# EAGLE board DuckyBRD (EAGLE 9.7.0)
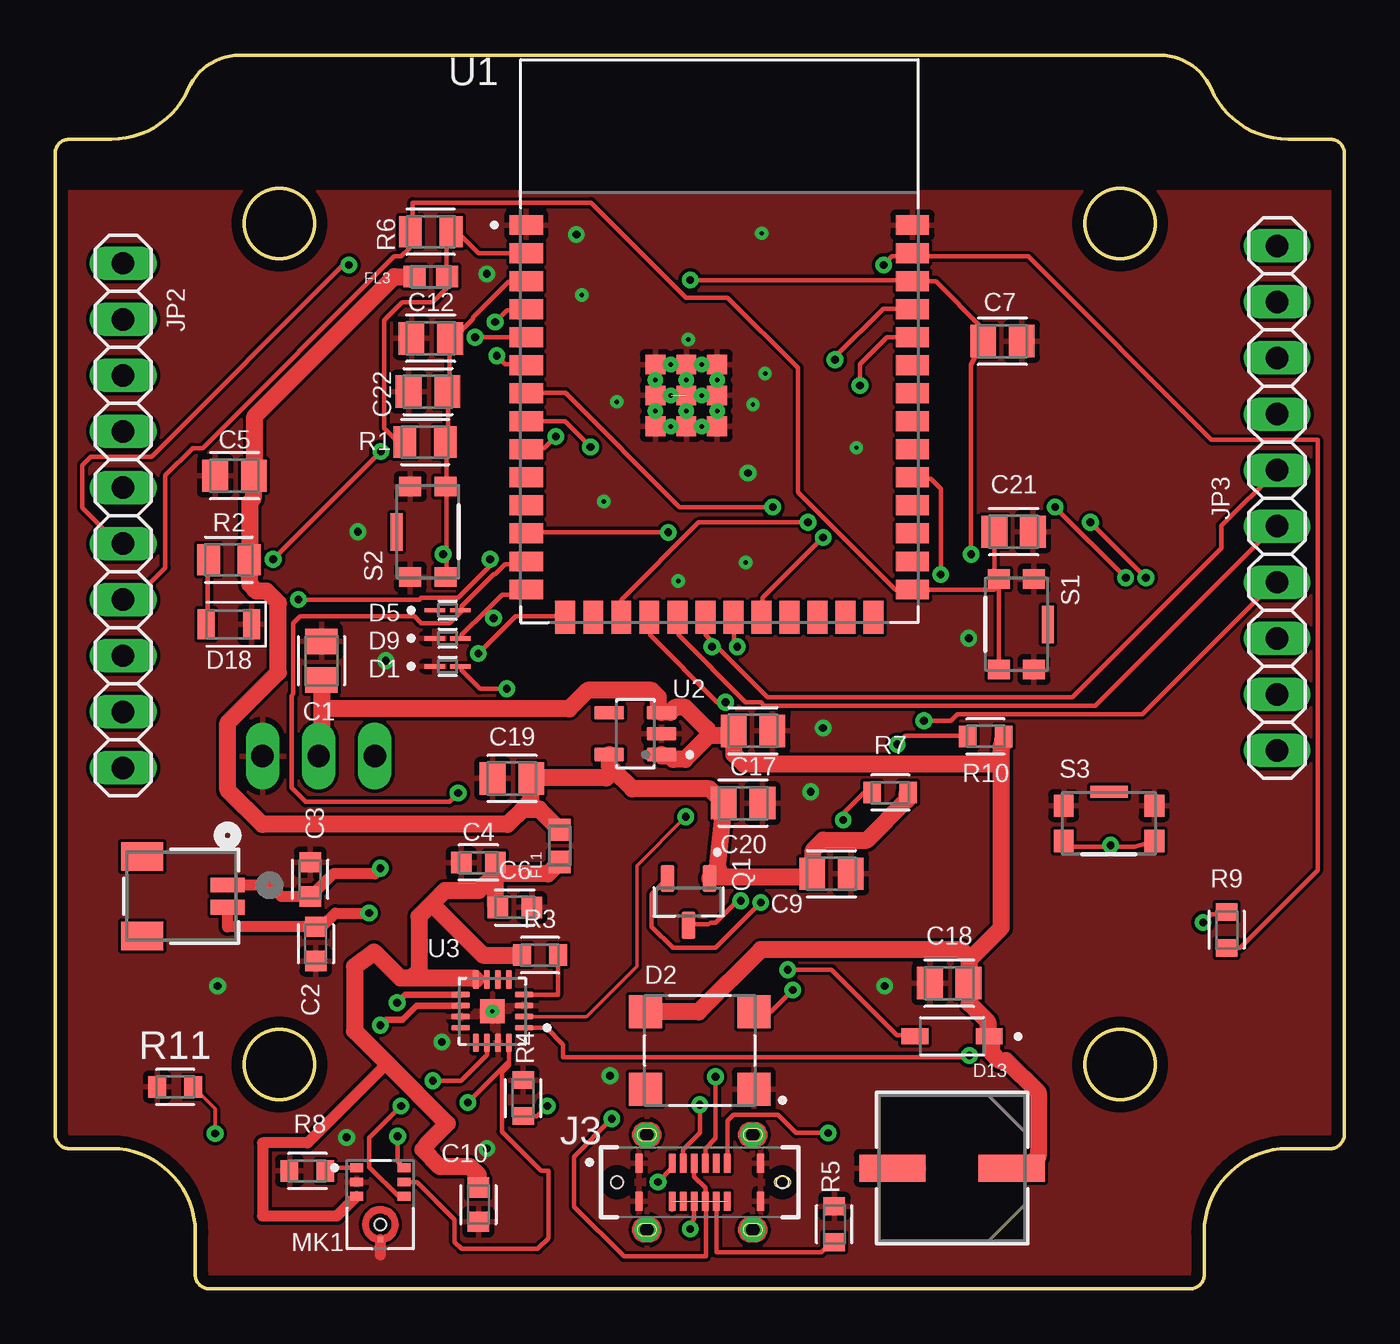
[diagram p0: board, top side]
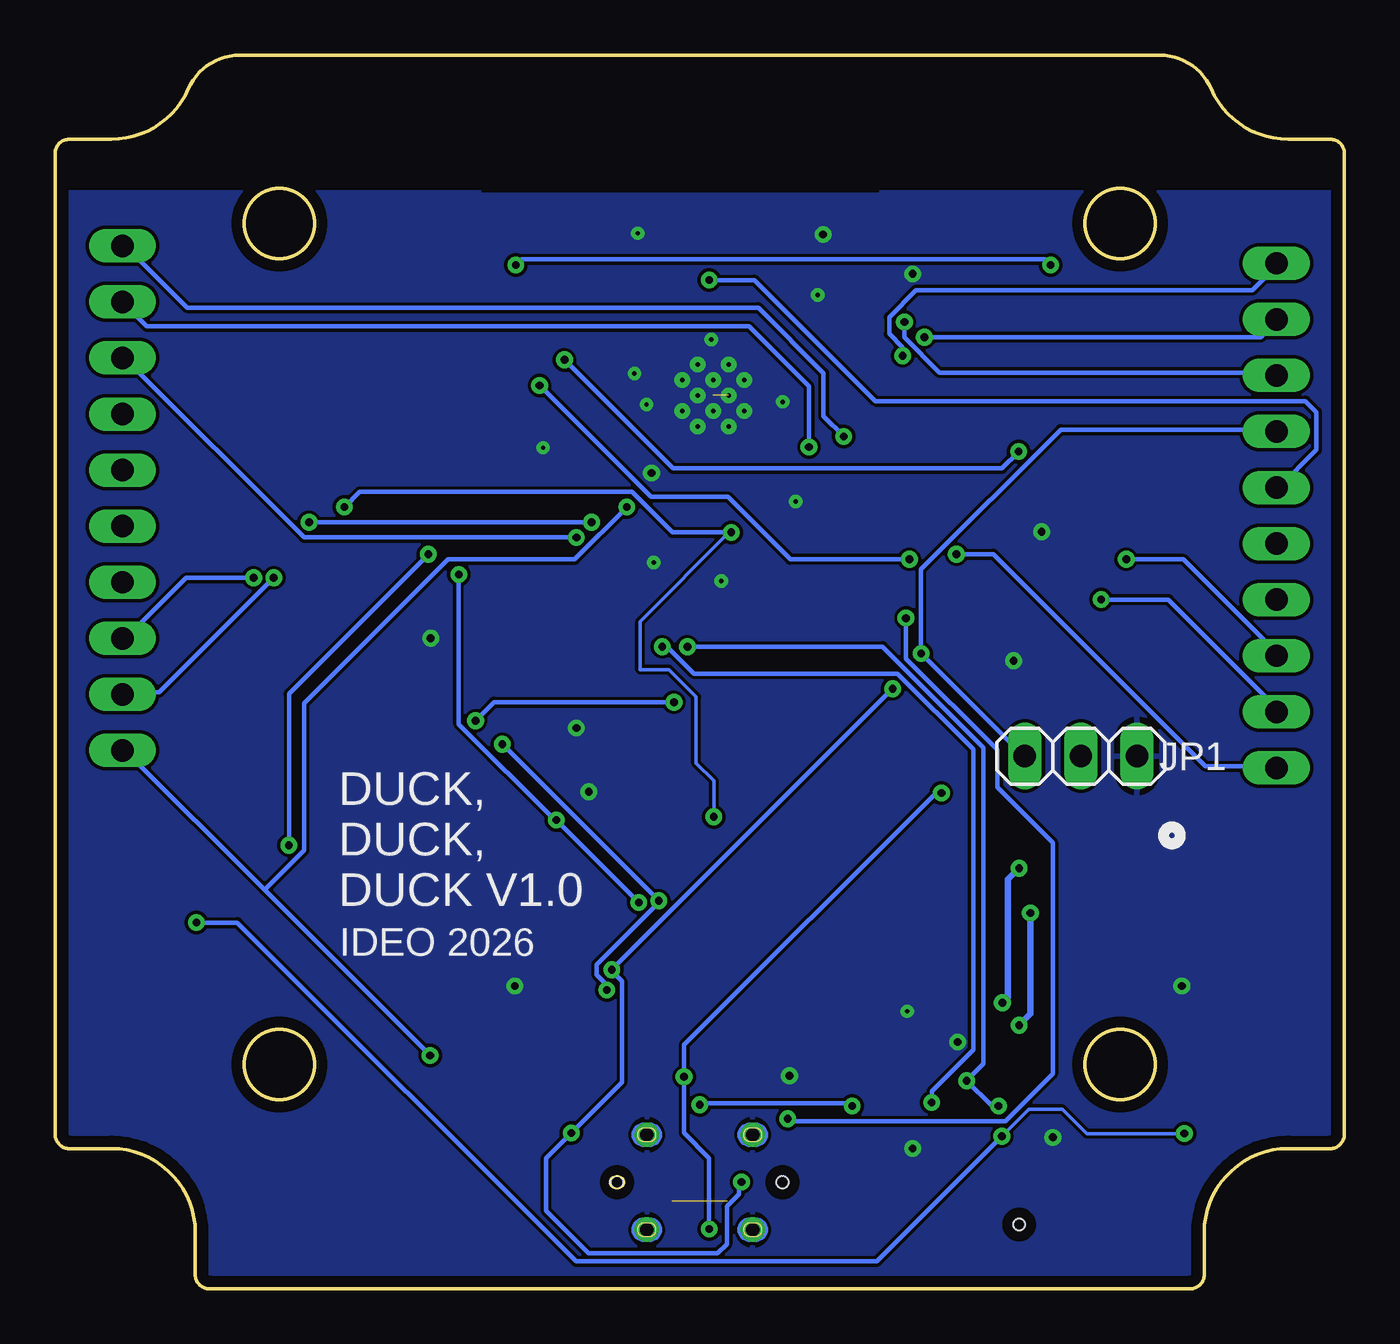
[diagram p1: board, bottom side, seen from below]

Size 58.42 x 55.88 mm. Coordinates in mm from the lower left corner, seen from the top.
Outline: 0,6.99 arc90 0.63,6.35 2.54,6.35 arc-90 6.35,2.54 6.35,0.63 arc90 6.99,0 51.44,0 arc90 52.07,0.63 52.07,2.54 arc-90 55.88,6.35 57.79,6.35 arc90 58.42,6.99 58.42,51.44 arc90 57.79,52.07 55.88,52.07 arc-66 52.39,54.36 arc66 50.06,55.88 8.36,55.88 arc66 6.03,54.36 arc-66 2.54,52.07 0.63,52.07 arc90 0,51.44 0,6.99
Outline: circle at 10.16,10.16 radius 1.59
Outline: circle at 10.16,48.26 radius 1.59
Outline: circle at 10.16,10.16 radius 1.59
Outline: circle at 10.16,48.26 radius 1.59
Outline: circle at 48.26,10.16 radius 1.59
Outline: circle at 48.26,48.26 radius 1.59
Copper layers (1*16): Top 0.035mm / dielectric 1.5mm / Bottom 0.035mm
Design rules "Fusion Electronics Design Rules": minimum track width 6mil, minimum drill 0.15mm, track to track 6mil, track to pad 6mil, pad to pad 6mil, via to via 6mil, smd to smd 6mil, copper to edge 20mil, drill to drill 6mil, minimum pad ring 10mil, minimum via ring 8mil, stop-mask expansion 4mil, vias tented up to drill 0mil, thermal gap 10mil
Net classes: 2 PWR_5V: width 0.508 mm; 3 PWR_3V3: width 0.152 mm; 4 SIG: width 0.152 mm
tRestrict: area 0,49.8 to 58.4,58.9
bRestrict: area 0,49.8 to 58.4,58.9

## Footprints (pad centres in the part's own frame; a part is rotated, then mirrored left to right if it is on the bottom)
CAPC2012X110 = smd 1.165 x 1.465: 1 -0.875,0; 2 0.875,0
CAPC1608X85 = smd 0.921 x 0.97: 1 -0.775,0; 2 0.775,0
CAP_UWF_6P3X5P4_NCH = smd 2.997 x 1.219: 1 -2.705,0; 2 2.705,0
DIOM1006X40N = smd 0.94 x 0.2: A 0.58,0; C -0.58,0
LED_XL-5050RGBC-WS2812B = smd 1.5 x 1.5: 1 -2.45,1.75; 2 -2.45,-1.75; 3 2.45,-1.75; 4 2.45,1.75
SOD3715X145N = smd 1.21 x 0.73: A 1.68,0; C -1.68,0
LEDC2012X110N_FLAT-R = smd 0.762 x 1.362: A 1.025,0; C -1.025,0
BEADC1608X95N = smd 1 x 0.97: 1 -0.735,0; 2 0.735,0
CONN_SM02B-SRSS-TB_JST = smd 0.66 x 1.549: 1 0.5,-2.099; 2 -0.5,-2.099 | smd 1.295 x 1.905: 3 -1.8,1.776; 4 1.8,1.776
GCT_USB4120-03-C_REVA6 = smd 0.3 x 0.87: A1 -2.75,0.865; A4 -1.25,0.865; A5 -0.75,0.865; A6 -0.25,0.865; A7 0.25,0.865; A8 0.75,0.865; A9 1.25,0.865; A12 2.75,0.865; B1 2.75,-0.865; B4 1.25,-0.865; B5 0.75,-0.865; B6 0.25,-0.865; B7 -0.25,-0.865; B8 -0.75,-0.865; B9 -1.25,-0.865; B12 -2.75,-0.865 | drill 0.6 pad 1.1: S1 -2.4,2.15; S2 -2.4,-2.15; S3 2.4,2.15; S4 2.4,-2.15 | hole 0.52: -3.75,0; 3.75,0
1X03 = drill 1.016 long: 1 -2.54,0; 2 0,0; 3 2.54,0
1X10 = drill 1.016 long: 1 -11.43,0; 2 -8.89,0; 3 -6.35,0; 4 -3.81,0; 5 -1.27,0; 6 1.27,0; 7 3.81,0; 8 6.35,0; 9 8.89,0; 10 11.43,0
MIC_ICS-43432 = smd 0.6 x 0.4: 1 -1.075,1.675; 2 -1.075,1.025; 3 -1.075,0.375; 5 1.075,0.375; 6 1.075,1.025; 7 1.075,1.675 | smd 0.24 x 0.24: 4 0,-1.58 | hole 0.5: 0,-0.9
SOT95P240X111-3N = smd 1.23 x 0.6: 1 -1.06,0.95; 2 -1.06,-0.95; 3 1.06,0
RESC2012X65 = smd 1.031 x 1.42: 1 -0.919,0; 2 0.919,0
RESC1608X60 = smd 0.799 x 0.974: 1 -0.815,0; 2 0.815,0
SW_KMR221GLFS = smd 0.9 x 1: 1 -2.05,0.8; 2 -2.05,-0.8; 3 2.05,-0.8; 4 2.05,0.8 | smd 1.7 x 0.55: 5 0,1.425
XCVR_ESP32S3WROOM1N8R8 = smd 1.5 x 0.9: 1 -8.75,5.26; 2 -8.75,3.99; 3 -8.75,2.72; 4 -8.75,1.45; 5 -8.75,0.18; 6 -8.75,-1.09; 7 -8.75,-2.36; 8 -8.75,-3.63; 9 -8.75,-4.9; 10 -8.75,-6.17; 11 -8.75,-7.44; 12 -8.75,-8.71; 13 -8.75,-9.98; 14 -8.75,-11.25; 27 8.75,-11.25; 28 8.75,-9.98; 29 8.75,-8.71; 30 8.75,-7.44; 31 8.75,-6.17; 32 8.75,-4.9; 33 8.75,-3.63; 34 8.75,-2.36; 35 8.75,-1.09; 36 8.75,0.18; 37 8.75,1.45; 38 8.75,2.72; 39 8.75,3.99; 40 8.75,5.26 | smd 0.9 x 1.5: 15 -6.985,-12.5; 16 -5.715,-12.5; 17 -4.445,-12.5; 18 -3.175,-12.5; 19 -1.905,-12.5; 20 -0.635,-12.5; 21 0.635,-12.5; 22 1.905,-12.5; 23 3.175,-12.5; 24 4.445,-12.5; 25 5.715,-12.5; 26 6.985,-12.5 | smd 0.9 x 0.9: 41_1 -1.5,-2.46; 41_2 -2.9,-2.46; 41_3 -0.1,-2.46; 41_4 -2.9,-3.86; 41_5 -1.5,-3.86; 41_6 -0.1,-3.86; 41_7 -2.9,-1.06; 41_8 -1.5,-1.06; 41_9 -0.1,-1.06 | drill 0.2 pad 0.4: 41_10 -1.5,-1.76; 41_11 -2.9,-1.76; 41_12 -0.1,-1.76; 41_13 -2.9,-3.16; 41_14 -1.5,-3.16; 41_15 -0.1,-3.16; 41_16 -2.2,-1.06; 41_17 -0.8,-1.06; 41_18 -2.2,-2.46; 41_19 -0.8,-2.46; 41_20 -2.2,-3.86; 41_21 -0.8,-3.86
SOT95P285X140-5N = smd 1.35 x 0.6: 1 -1.185,0.95; 2 -1.185,0; 3 -1.185,-0.95; 4 1.185,-0.95; 5 1.185,0.95
QFN50P300X300X80-17N = smd 0.84 x 0.27: 1 -1.435,0.75; 2 -1.435,0.25; 3 -1.435,-0.25; 4 -1.435,-0.75; 9 1.435,-0.75; 10 1.435,-0.25; 11 1.435,0.25; 12 1.435,0.75 | smd 0.27 x 0.84: 5 -0.75,-1.435; 6 -0.25,-1.435; 7 0.25,-1.435; 8 0.75,-1.435; 13 0.75,1.435; 14 0.25,1.435; 15 -0.25,1.435; 16 -0.75,1.435 | smd 1.1 x 1.1: 17 0,0

## Placement (x,y rotation side)
C1  10uF/25V (20%)  [CAPC2012X110]  12.07,28.45 90 top
C2  220pF  [CAPC1608X85]  11.81,15.62 90 top
C3  220pF  [CAPC1608X85]  11.56,18.54 270 top
C4  10uF  [CAPC1608X85]  19.18,19.3 0 top
C5  10uF/25V (20%)  [CAPC2012X110]  8.13,36.83 0 top
C6  0.1uF  [CAPC1608X85]  20.83,17.27 180 top
C7  0.1uF/50V(10%)  [CAPC2012X110]  42.93,42.93 0 top
C8  UWJ1C101MCL1GBCAP_UWF_6P3X5P4_NCH  [CAP_UWF_6P3X5P4_NCH]  40.64,5.46 180 top
C9  0.1uF/50V(10%)  [CAPC2012X110]  35.18,18.8 180 top
C10  0.1uF  [CAPC1608X85]  19.18,3.81 90 top
C12  1uF/16V(10%)  [CAPC2012X110]  17.02,43.05 0 top
C17  10uF/25V(20%)  [CAPC2012X110]  31.62,25.27 180 top
C18  0.1uF/50V(10%)  [CAPC2012X110]  40.51,13.84 0 top
C19  0.1uF/50V(10%)  [CAPC2012X110]  20.7,23.11 0 top
C20  10uF/25V(20%)  [CAPC2012X110]  31.18,22 180 top
C21  0.1uF/50V(10%)  [CAPC2012X110]  43.43,34.29 0 top
C22  0.1uF/50V(10%)  [CAPC2012X110]  16.89,40.64 180 top
D1  ESD9L5.0ST5G  [DIOM1006X40N]  17.78,28.19 0 top
D2  XL-5050RGBC-WS2812B  [LED_XL-5050RGBC-WS2812B]  29.21,10.8 0 top
D5  ESD9L5.0ST5G  [DIOM1006X40N]  17.78,30.73 0 top
D9  ESD9L5.0ST5G  [DIOM1006X40N]  17.78,29.46 0 top
D13  1N5819HW-7-F  [SOD3715X145N]  40.64,11.43 180 top
D18  CHIP-FLAT-R_0805  [LEDC2012X110N_FLAT-R]  7.87,30.1 180 top
FL1  BLM18BD601SN1D  [BEADC1608X95N]  22.86,20.07 90 top
FL3  BLM18BD601SN1D  [BEADC1608X95N]  17.02,45.85 180 top
J1  SM02B-SRSS-TBCONN_SM02B-SRSS-TB_JST  [CONN_SM02B-SRSS-TB_JST]  5.72,17.78 90 top
J3  USB4120-03-C_REVA6  [GCT_USB4120-03-C_REVA6]  29.21,4.83 0 top
JP1  PINHD-1X3  [1X03]  11.94,24.13 0 bottom
JP2  PINHD-1X10  [1X10]  3.08,35.02 90 top
JP3  PINHD-1X10  [1X10]  55.37,35.81 90 top
MK1  ICS-43432  [MIC_ICS-43432]  14.73,3.81 0 top
Q1  BSS138  [SOT95P240X111-3N]  28.7,17.53 270 top
R1  10K(1%)  [RESC2012X65]  16.76,38.35 180 top
R2  5.1K (1%)  [RESC2012X65]  7.87,33.02 180 top
R3  1M  [RESC1608X60]  21.97,15.11 0 top
R4  5k1  [RESC1608X60]  21.21,8.64 270 top
R5  5k1  [RESC1608X60]  35.31,2.92 270 top
R6  10K(1%)  [RESC2012X65]  17.02,47.88 0 top
R7  10K  [RESC1608X60]  37.85,22.48 0 top
R8  10K  [RESC1608X60]  11.43,5.33 0 top
R9  68  [RESC1608X60]  53.09,16.26 90 top
R10  10K  [RESC1608X60]  42.16,25.02 0 top
R11  100K  [RESC1608X60]  5.44,9.14 0 top
S1  KMR221GLFS  [SW_KMR221GLFS]  43.56,30.1 270 top
S2  KMR221GLFS  [SW_KMR221GLFS]  16.89,34.29 90 top
S3  KMR221GLFS  [SW_KMR221GLFS]  47.75,21.08 0 top
U1  ESP32-S3-WROOM-1-N8R8  [XCVR_ESP32S3WROOM1N8R8]  30.1,42.93 0 top
U2  AP2112K-3.3TRG1  [SOT95P285X140-5N]  26.29,25.15 180 top
U3  MAX98357AETE+T  [QFN50P300X300X80-17N]  19.81,12.57 180 top

## Library data of the parts
C1 = Tutorial - Fusion 360; CATEGORY: Capacitor; LCSC: C15850
C2 C3 = Capacitor; CATEGORY: Capacitor; LCSC: C27675; PACKAGE_SIZE: 0603; PACKAGE_TYPE: Surface Mount; SUBCATEGORY: Ceramic Capacitors; TYPE: MLCC
C4 = Capacitor; CATEGORY: Capacitor; LCSC: C1691; PACKAGE_SIZE: 0603; PACKAGE_TYPE: Surface Mount; SUBCATEGORY: Ceramic Capacitors; TYPE: MLCC
C5 C17 C20 = Capacitor; CATEGORY: Capacitor; LCSC: C15850; PACKAGE_SIZE: 0805; PACKAGE_TYPE: Surface Mount; SUBCATEGORY: Ceramic Capacitors; TYPE: MLCC
C6 C10 = Capacitor; CATEGORY: Capacitor; LCSC: C14663; PACKAGE_SIZE: 0603; PACKAGE_TYPE: Surface Mount; SUBCATEGORY: Ceramic Capacitors; TYPE: MLCC
C7 C9 C18 C19 C21 C22 = Capacitor; CATEGORY: Capacitor; LCSC: C49678; PACKAGE_SIZE: 0805; PACKAGE_TYPE: Surface Mount; SUBCATEGORY: Ceramic Capacitors; TYPE: MLCC
C8 = Ducky Library; COPYRIGHT: Copyright (C) 2026 Ultra Librarian. All rights reserved.; LCSC: C2887276; MANUFACTURER_NAME: Nichicon; MANUFACTURER_PART_NUMBER: UWJ1C101MCL1GB
C12 = Capacitor; CATEGORY: Capacitor; LCSC: C28323; PACKAGE_SIZE: 0805; PACKAGE_TYPE: Surface Mount; SUBCATEGORY: Ceramic Capacitors; TYPE: MLCC
D1 D5 D9 = Ducky Library; LCSC: C82326; MANUFACTURER: OnSemi; MAXIMUM_PACKAGE_HEIGHT: 0.4mm; PARTREV: 7; STANDARD: IPC-7351B
D2 = Ducky Library; LCSC: C2843785; MANUFACTURER: Xinglight; MAXIMUM_PACKAGE_HEIGHT: 1.6mm; PARTREV: N/A; STANDARD: Manufacturer Recommendations
D13 = Ducky Library; LCSC: C82544; MANUFACTURER: Diodes Inc.; PARTREV: 18-2; STANDARD: IPC-7351B
D18 = LED; CATEGORY: LED; COLOR: Red; DESCRIPTION: Red LED Indication 0805 (2012 Metric); LCSC: C84256; PACKAGE_SIZE: 0805; PACKAGE_TYPE: Surface Mount; SUBCATEGORY: Chip LED; TYPE: Square with Flat Top
FL1 FL3 = Ducky Library; LCSC: C1002
J1 = Ducky Library; COPYRIGHT: Copyright (C) 2026 Ultra Librarian. All rights reserved.; LCSC: C160402; MANUFACTURER_NAME: JST; MANUFACTURER_PART_NUMBER: SM02B-SRSS-TB
J3 = Ducky Library; LCSC: C3445864; MANUFACTURER: Global Connector Technology; MAXIMUM_PACKAGE_HEIGHT: 6.5mm; PARTREV: A6; SNAPEDA_PN: USB4120-03-C; STANDARD: Manufacturer Recommendations
JP1 = Connector; CATEGORY: Connectors; DESCRIPTION: Header-Straight-3 Position; LCSC: C49257; PACKAGE_TYPE: Through Hole; PITCH: 0.100" (2.54mm); SUBCATEGORY: Headers; TYPE: Male Pins
JP2 JP3 = Connector; CATEGORY: Connectors; DESCRIPTION: Header-Straight-10 Position; LCSC: C57369; PACKAGE_TYPE: Through Hole; PITCH: 0.100" (2.54mm); SUBCATEGORY: Headers; TYPE: Male Pins
MK1 = Ducky Library; LCSC: C574021; MANUFACTURER: TDK Invensense; MAXIMUM_PACKAGE_HEIGHT: 1.1mm; PARTREV: 1.3; SNAPEDA_PN: ICS-43432; STANDARD: Manufacturer Recommendations
Q1 = BSS138; AVAILABILITY: In Stock; CHECK_PRICES: https://www.snapeda.com/parts/BSS138/Onsemi/view-part/?ref=eda; DESCRIPTION: N-Channel 50 V 220mA (Ta) 350mW (Ta) Surface Mount SOT-23-3; LCSC: C52895; LCSC_PART: C82045; MF: onsemi; MP: BSS138; PACKAGE: SOT-23-3 ON Semiconductor; PRICE: None; SNAPEDA_LINK: https://www.snapeda.com/parts/BSS138/Onsemi/view-part/?ref=snap
R1 R6 = Resistor; CATEGORY: Resistors; DESCRIPTION: Chip Resistor 2.00 X 1.25 X 0.65 mm body 0805(2012-METRIC) Package; LCSC: C17414; PACKAGE_SIZE: 0805; PACKAGE_TYPE: Surface Mount
R2 = Resistor; CATEGORY: Resistors; DESCRIPTION: Chip Resistor 2.00 X 1.25 X 0.65 mm body 0805(2012-METRIC) Package; LCSC: C27834; PACKAGE_SIZE: 0805; PACKAGE_TYPE: Surface Mount
R3 = Resistor; CATEGORY: Resistors; DESCRIPTION: Chip Resistor 1.60 X 0.82 X 0.60 mm body 0603(1608-METRIC) Package; LCSC: C22935; PACKAGE_SIZE: 0603; PACKAGE_TYPE: Surface Mount
R4 R5 = Resistor; CATEGORY: Resistors; DESCRIPTION: Chip Resistor 1.60 X 0.82 X 0.60 mm body 0603(1608-METRIC) Package; LCSC: C23186; PACKAGE_SIZE: 0603; PACKAGE_TYPE: Surface Mount
R7 R8 R10 = Resistor; CATEGORY: Resistors; DESCRIPTION: Chip Resistor 1.60 X 0.82 X 0.60 mm body 0603(1608-METRIC) Package; LCSC: C25804; PACKAGE_SIZE: 0603; PACKAGE_TYPE: Surface Mount
R9 = Resistor; CATEGORY: Resistors; DESCRIPTION: Chip Resistor 1.60 X 0.82 X 0.60 mm body 0603(1608-METRIC) Package; LCSC: C23220; PACKAGE_SIZE: 0603; PACKAGE_TYPE: Surface Mount
R11 = Resistor; CATEGORY: Resistors; DESCRIPTION: Chip Resistor 1.60 X 0.82 X 0.60 mm body 0603(1608-METRIC) Package; LCSC: C25803; PACKAGE_SIZE: 0603; PACKAGE_TYPE: Surface Mount
S1-S3 = Ducky Library; LCSC: C72443; MANUFACTURER: CnK
U1 = Ducky Library; AVAILABILITY: In Stock; DESCRIPTION: Bluetooth, WiFi 802.11b/g/n, Bluetooth v5.0 Transceiver Module 2.4GHz PCB Trace Surface Mount; LCSC: C2913201; MF: Espressif Systems; MP: ESP32S3WROOM1N8R8; PACKAGE: SMD-41 Espressif Systems; PRICE: None; PURCHASE-URL: https://pricing.snapeda.com/search/part/ESP32S3WROOM1N8R8/?ref=eda
U2 = Ducky Library; LCSC: C51118; MANUFACTURER: Diodes Inc.; PARTREV: 2-2
U3 = Ducky Library; AVAILABILITY: Unavailable; DESCRIPTION: Audio Amp Speaker 1-CH Mono Class-D 16-Pin TQFN EP T/R; LCSC: C910544; MF: Maxim Integrated; MP: MAX98357AETE+T; PACKAGE: TQFN-16 Maxim; PRICE: None

## Nets
BCLK [SIG]: JP3.7
BLCK [SIG]: MK1.6 U1.21 U3.16
CHIP_PU [SIG]: C12.2 C22.1 JP2.1 R1.1 S2.2 S2.3 U1.3
DIN [SIG]: JP3.1 U1.7 U3.1
ESP_3V3 [SIG]: FL3.1 R1.2 R6.2 U1.2
GND [SIG]: C1.2 C2.1 C3.1 C4.1 C5.1 C6.1 C7.2 C8.2 C9.1 C10.1 C12.1 C17.1 C18.1 C19.1 C20.1 C21.2 C22.2 D1.C D2.3 D9.C D18.C J3.A1 J3.A12 J3.B1 J3.B12 J3.S1 J3.S2 J3.S3 J3.S4 JP1.3 MK1.2 MK1.4 R4.1 R5.1 R8.1 R11.1 S1.1 S1.4 S2.1 S2.4 S3.1 S3.4 U1.1 U1.40 U1.41_1 U1.41_2 U1.41_3 U1.41_4 U1.41_5 U1.41_6 U1.41_7 U1.41_8 U1.41_9 U1.41_10 U1.41_11 U1.41_12 U1.41_13 U1.41_14 U1.41_15 U1.41_16 U1.41_17 U1.41_18 U1.41_19 U1.41_20 U1.41_21 U2.2 U3.3 U3.11 U3.15 U3.17
GPIO0 [SIG]: C21.1 JP2.4 R6.1 S1.2 S1.3 U1.27
GPIO2 [SIG]: C7.1 JP2.6 S3.2 S3.3 U1.38
GPIO3 [SIG]: JP1.1 JP2.7 U1.15
GPIO4 [SIG]: JP2.8 U1.4
GPIO5 [SIG]: JP2.9 U1.5
GPIO6 [SIG]: JP2.10 U1.6
GPIO8 [SIG]: JP3.2 U1.12 U3.2
GPIO9 [SIG]: JP3.3 U1.17
GPIO10 [SIG]: JP3.4 U1.18
GPIO11 [SIG]: JP3.5 U1.19
GPIO14 [SIG]: JP3.8 U1.22
GPIO15 [SIG]: JP3.9 U1.8
GPIO16 [SIG]: JP3.10 U1.9
GPIO17 [SIG]: U1.10
GPIO18 [SIG]: U1.11
GPIO19 [SIG]: D5.A J3.A7 J3.B7 U1.13
GPIO20 [SIG]: D9.A J3.A6 J3.B6 U1.14
GPIO21 [SIG]: U1.23
GPIO35 [SIG]: U1.28
GPIO36 [SIG]: U1.29
GPIO37 [SIG]: U1.30
GPIO38 [SIG]: Q1.2 R7.1 U1.31
GPIO39 [SIG]: U1.32
GPIO40 [SIG]: U1.33
GPIO41 [SIG]: U1.34
GPIO42 [SIG]: U1.35
GPIO45 [SIG]: U1.26
GPIO46 [SIG]: U1.16
GPIO47 [SIG]: U1.24
GPIO48 [SIG]: U1.25
LR [SIG]: MK1.1 R8.2
LRCLK [SIG]: JP3.6 MK1.5 U1.20 U3.14
MIC_OUT [SIG]: JP2.5 R9.1 U1.39
N$1 [SIG]: J3.A5 R4.2
N$2 [SIG]: D1.A D13.A J3.A4 J3.A9
N$3 [SIG]: J3.B5 R5.2
N$7 [SIG]: D5.C
N$8 [SIG]: MK1.7 R9.2 R11.2
N$11 [SIG]: D18.A R2.2
RGB_CTRL [SIG]: D2.4 Q1.3 R10.1
SD_MODE [SIG]: R3.2 U3.4
U0RXD [SIG]: JP2.2 U1.36
U0TXD [SIG]: JP2.3 U1.37
V0+ [SIG]: C3.2 J1.1 U3.9
V0- [SIG]: C2.2 J1.2 U3.10
VBUS_B: J3.B4 J3.B9
VCC_3V3 [PWR_5V]: C5.2 C9.2 C19.2 C20.2 FL1.2 FL3.2 Q1.1 R2.1 R7.2 U2.5
VCC_5V [PWR_5V]: C1.1 C8.1 C17.2 C18.2 D2.1 D13.C JP1.2 R10.2 U2.1 U2.3
VDD [PWR_5V]: C4.2 C6.2 C10.2 FL1.1 MK1.3 R3.1 U3.7 U3.8

## Tracks (layer width: path | path; a pad name or v marks a point on that pad's centre or on a via)
BLCK  (via drill 0.35)
  Top 0.203: v30.91,29.08 30.76,29.23 30.76,30.38 U1.21 | v18.69,8.43 20.56,10.3 U3.16 20.56,10.12 20.24,9.8 20.24,7.11 22.02,5.33 22.35,5.33 22.35,2.29 21.87,1.8 18.41,1.8 18.11,2.11 18.11,3.12 16.4,4.83 MK1.6
  Bottom 0.203: v30.91,29.08 30.68,29.08 29.46,27.86 20.24,27.86 16.82,24.44 16.82,10.82 18.69,8.94 v18.69,8.43
CHIP_PU  (via drill 0.35)
  Top 0.203: 17.73,33.27 17.73,36.32 S2.3 17.73,36.4 17.73,38.3 R1.1 17.65,38.46 17.8,38.61 17.8,40.59 C22.1 17.88,40.59 17.88,43.03 C12.2 17.96,42.95 18.95,43.94 18.95,44.02 20.55,45.62 21.31,45.62 U1.3 | 17.73,33.27 17.73,32.28 S2.2 | v17.58,33.27 17.73,33.27
  Bottom 0.203: v17.58,33.27 15.91,33.27 6.31,23.67 3.08,23.67 JP2.1
DIN  (via drill 0.35)
  Top 0.203: U3.1 22.26,11.82 23.03,11.06 23.03,10.49 41.35,10.49 v41.43,10.57 | v32.51,35.41 28.3,35.41 23.12,40.59 21.39,40.59 U1.7
  Bottom 0.203: 48.93,18.07 55.22,24.36 55.37,24.36 JP3.1 | 48.93,18.07 v41.43,10.57 | v32.51,35.41 34.87,33.05 40.62,33.05 47.14,26.52 47.14,19.86 48.93,18.07
ESP_3V3
  Top 0.203: R1.2 15.82,38.38 15.52,38.38 14.91,38.99 14.91,43.87 15.72,44.68 17.09,44.68 17.8,45.39 17.8,45.77 FL3.1 17.73,45.85 17.73,47.68 17.88,47.83 R6.2 18.03,47.9 18.19,47.9 19.18,46.91 21.31,46.91 U1.2
GND  (via drill 0.2, 0.35)  (1 unrouted)
  Top 0.152: U3.17
  Top 0.203: J3.A12 31.96,5.93
  Top 0.508: MK1.4 14.73,1.52
  other vias: 23.62,47.75 34.24,22.51 7.37,13.72 25.15,9.65 19.56,6.35 14.99,28.45 13.72,34.29 19.56,45.97 17.53,11.18 34.8,25.4 37.59,13.72 41.4,29.46 13.21,6.86 19.81,12.57 32.17,41.47 31.62,40.06 36.31,38.1 24.87,35.66 23.87,45.02 32.02,47.82 31.29,32.9 25.45,40.18 28.7,43 31.4,36.96 28.24,32.06
  pour Top: 282 corners
  pour Bottom: 282 corners
GPIO0
  Top 0.203: C21.1 42.57,34.27 42.57,32.4 S1.2 | S1.2 42.57,31.67 38.91,31.67 U1.27 38.76,31.67 38.08,31.67 33.66,36.08 33.66,41.71 30.48,44.9 28.61,44.9 28.6,44.88 24.28,49.2 16.21,49.2 16.21,47.9 16.13,47.83 R6.1 16.05,47.83 16.05,47.14 15.67,46.76 15.37,46.76 6.68,38.08 6.22,38.08 4.99,36.84 4.99,32.67 3.54,31.21 JP2.4 | S1.2 S1.3
GPIO2  (via drill 0.35)
  Top 0.203: 47.83,20.02 48.9,20.02 S3.3 | 47.83,20.02 46.08,20.02 S3.2 | v41.5,33.27 41.5,41.86 C7.1 42.05,43.5 39.9,45.65 U1.38 38.76,45.7 v28.78,45.7 | v47.83,20.09 47.83,20.02
  Bottom 0.203: v47.83,20.09 47.83,26.95 v41.5,33.27 | JP2.6 2.97,36.29 1.27,38 1.27,39.72 1.76,40.21 21.25,40.21 26.73,45.7 v28.78,45.7
GPIO3  (via drill 0.35)
  Top 0.203: v19.18,28.78 20.85,30.45 23.06,30.45 U1.15
  Bottom 0.203: JP1.1 14.53,24.13 v19.18,28.78 19.18,32.59 12.85,38.91 3.08,38.91 JP2.7
GPIO4  (via drill 0.35)
  Top 0.203: v19.94,43.79 20.47,44.32 21.31,44.32 U1.4
  Bottom 0.203: v19.94,43.79 19.94,43.1 18.34,41.5 3.08,41.5 JP2.8
GPIO5  (via drill 0.35)
  Top 0.203: v19.03,43.1 21.31,43.1 U1.5
  Bottom 0.203: v19.03,43.1 3.79,43.1 3.08,43.81 JP2.9
GPIO6  (via drill 0.35)
  Top 0.203: v20.02,42.27 20.4,41.88 21.31,41.88 U1.6
  Bottom 0.203: v20.02,42.27 20.02,42.65 20.62,43.26 20.62,44.02 19.41,45.24 4.17,45.24 3.08,46.32 JP2.10
GPIO8  (via drill 0.35)
  Top 0.152: U3.2 24.08,12.32 26.36,14.61 26.36,19.17 v28.57,21.38
  Top 0.203: v27.79,34.27 21.39,34.27 U1.12 | v48.51,32.21 v45.31,35.41
  Bottom 0.152: v28.57,21.38 28.57,23 29.37,23.8 29.37,26.81 30.61,28.05 31.91,28.05 31.91,30.23 27.88,34.27
  Bottom 0.203: v27.79,34.27 27.88,34.27 30.45,34.27 32.28,36.09 44.63,36.09 v45.31,35.41 | v48.51,32.21 53.7,27.03 55.3,27.03 55.37,26.95 JP3.2
GPIO9  (via drill 0.35)
  Top 0.203: U1.17 25.65,31.22 29.16,34.72 v34.11,34.72 | v49.43,32.21 v46.91,34.72
  Bottom 0.203: v46.91,34.72 v34.11,34.72 | v49.43,32.21 52.48,32.21 55.22,29.46 JP3.3
GPIO10  (via drill 0.35)
  Top 0.203: v30.38,26.57 30,26.57 26.95,29.62 26.95,30.38 U1.18 | v39.37,25.73 40.59,25.73 40.89,26.04 49.28,26.04 55.22,31.98 55.37,31.98 JP3.4
  Bottom 0.203: v30.38,26.57 38.53,26.57 v39.37,25.73
GPIO11
  Top 0.203: U1.19 28.25,30.38 28.25,29.62 31.29,26.57 31.98,26.57 32.13,26.42 47.14,26.42 55.22,34.49 55.37,34.49 JP3.5
GPIO14  (via drill 0.35)
  Top 0.203: v34.8,34.04 32.05,31.29 32.05,30.45 U1.22
  Bottom 0.203: v34.8,34.04 47.14,34.04 55.22,42.11 55.37,42.11 JP3.8
GPIO15  (via drill 0.35)
  Top 0.203: v24.26,38.13 23.1,39.29 21.39,39.29 U1.8
  Bottom 0.203: v24.26,38.13 24.26,40.89 26.97,43.59 54.26,43.59 JP3.9
GPIO16  (via drill 0.35)
  Top 0.203: v22.68,38.61 22.15,38.08 21.39,38.08 U1.9
  Bottom 0.203: v22.68,38.61 23.6,39.52 23.6,41.48 26.56,44.44 52.44,44.44 55.22,47.22 55.37,47.22 JP3.10
GPIO19  (via drill 0.35)
  Top 0.203: U1.13 21.31,32.89 21.23,32.82 20.4,32.82 19.94,32.36 19.86,32.36 18.41,30.91 18.41,30.76 D5.A 18.41,30.68 17.88,30.15 16.59,30.15 16.28,30.45 11.1,30.45 10.8,30.15 10.8,26.95 10.72,26.87 10.72,22.69 11.35,22.06 17.87,22.06 v18.26,22.45 | v29.92,9.6 29.92,6.81 29.46,6.35 J3.A7 | J3.B7 28.96,3.16 28.78,2.97 v28.78,2.71
  Bottom 0.203: v18.26,22.45 18.52,22.45 29.92,11.05 v29.92,9.6 29.92,7.06 28.78,5.92 v28.78,2.71
GPIO20  (via drill 0.35)
  Top 0.203: 19.52,30.72 20.24,31.45 21.08,31.45 21.31,31.67 U1.14 | 19.52,30.72 18.41,29.62 18.41,29.46 D9.A | 19.52,30.72 v19.86,30.38 | J3.A6 28.96,5.08 29.46,4.57 J3.B6 29.49,3.93 29.49,1.48 29.48,1.46 25.77,1.46 23.52,3.72 23.52,5.99 v25.22,7.7
  Bottom 0.203: v25.22,7.7 25.12,7.59 15.36,7.59 13.21,9.75 13.21,20.21 15.72,22.73 15.72,24.41 19.86,28.55 v19.86,30.38
GPIO38  (via drill 0.35)
  Top 0.203: v35.71,21.23 35.71,21.54 36.63,22.45 37.01,22.45 R7.1 | v31.98,17.5 29.92,15.44 27.99,15.44 27.03,16.41 27.03,17.86 Q1.2 | v40.13,32.36 40.13,36.25 39.68,36.7 38.91,36.7 U1.31
  Bottom 0.203: v31.98,17.5 v35.71,21.23 35.79,21.23 40.13,25.58 v40.13,32.36
LR
  Top 0.203: MK1.1 12.4,5.49 R8.2
LRCLK  (via drill 0.35)
  Top 0.203: v15.67,8.28 14.22,6.83 14.22,5.51 15.55,4.18 MK1.5 | U3.14 19.56,10.6 18.39,9.42 v17.12,9.42 | U1.20 29.46,29.62 29.88,29.2 | 29.88,29.2 32.28,26.8 46.1,26.8 52.84,33.54 52.84,34.55 JP3.6 | 29.88,29.2 v29.77,29.08
  Bottom 0.203: v15.67,8.28 15.98,8.28 v17.12,9.42 16.36,10.18 16.36,24.51 20.93,29.08 v29.77,29.08
MIC_OUT  (via drill 0.35)
  Top 0.203: R9.1 53.7,15.44 57.21,18.96 57.21,38.46 52.4,38.46 44.09,46.76 39.06,46.76 38.91,46.91 U1.39 38.76,46.91 38.61,46.76 37.92,46.76 v37.54,46.38 | v13.31,46.38 13.06,46.38 4.37,37.69 1.62,37.69 1.23,37.31 1.23,35.37 2.85,33.75 JP2.5
  Bottom 0.203: v37.54,46.38 37.29,46.63 13.56,46.63 v13.31,46.38
N$1  (via drill 0.35)
  Top 0.203: v22.3,8.28 21.84,7.82 21.23,7.82 R4.2 | v29.21,8.33 29.21,7.06 28.45,6.3 28.46,6.3 J3.A5
  Bottom 0.203: v29.21,8.33 29.13,8.41 22.43,8.41 v22.3,8.28
N$2  (via drill 0.35)
  Top 0.203: v20.47,27.18 19.25,27.18 18.41,28.02 18.41,28.17 D1.A | v33.2,14.45 35.18,14.45 38.15,11.48 38.91,11.48 D13.A | v35.03,7.06 33.58,7.06 32.77,7.87 30.73,7.87 30.46,7.6 J3.A9 30.46,5.63 | J3.A4 27.96,5.47 v27.32,4.83
  Bottom 0.203: v20.47,27.18 v33.2,14.45 33.2,14.38 32.74,13.92 32.74,9.35 v35.03,7.06 36.17,5.92 36.17,3.53 34.25,1.6 28.41,1.6 27.98,2.02 27.98,3.73 27.43,4.28 27.43,4.72 v27.32,4.83
N$3
  Top 0.203: J3.B5 29.97,3.95 29.97,1.65 34.72,1.65 35.18,2.11 R5.2
N$8  (via drill 0.35)
  Top 0.152: R11.2 7.25,8.15 v7.25,7.03
  Top 0.203: v52.02,16.59 52.4,16.97 53.01,16.97 53.09,17.04 R9.2 | v15.52,6.91 15.52,5.77 MK1.7
  Bottom 0.152: v7.25,7.03 11.67,7.03 12.77,8.13 14.3,8.13 v15.52,6.91
  Bottom 0.203: v15.52,6.91 21.19,1.24 34.82,1.24 50.16,16.59 v52.02,16.59
N$11
  Top 0.203: D18.A 6.91,30.15 6.91,32.97 R2.2
RGB_CTRL  (via drill 0.35)
  Top 0.203: v38.15,24.66 38.53,25.04 41.27,25.04 R10.1 | v31.06,17.58 30.91,17.58 29.92,16.59 29.69,16.59 29.62,16.51 28.7,16.51 Q1.3 | v33.43,13.54 32.44,12.55 31.67,12.55 D2.4
  Bottom 0.203: v38.15,24.66 v31.06,17.58 31.06,17.5 33.88,14.68 33.88,14.22 33.43,13.77 v33.43,13.54
SD_MODE
  Top 0.203: U3.4 22.79,13.32 R3.2
U0RXD  (via drill 0.35)
  Top 0.203: v36.47,40.92 36.47,41.89 37.68,43.1 38.84,43.1 U1.36 | v19.71,33.05 19.71,32.74 18.26,31.29 16.59,31.29 16.51,31.22 v11.02,31.22
  Bottom 0.203: v36.47,40.92 31.42,35.87 27.94,35.87 25.11,33.05 v19.71,33.05 | v11.02,31.22 7.98,31.22 3.08,26.32 JP2.2
U0TXD  (via drill 0.35)
  Top 0.203: v35.34,42.08 35.34,42.21 37.53,44.4 38.84,44.4 U1.37 | v9.88,33.05 v14.76,37.92
  Bottom 0.203: v35.34,42.08 30.43,37.17 15.51,37.17 v14.76,37.92 | v9.88,33.05 7.29,33.05 3.08,28.84 JP2.3
V0+  (via drill 0.35)
  Top 0.305: U3.9 15.86,13.32 v15.49,12.95
  Top 0.508: J1.1 9.75,18.28 10.26,17.77 C3.2 12.59,18.8 14.48,18.8 v14.73,19.05
  Bottom 0.305: v15.49,12.95 15.24,13.21 15.24,18.54 v14.73,19.05
V0-  (via drill 0.35)
  Top 0.305: U3.10 16.38,12.82 15.75,12.19 14.99,12.19 v14.73,11.94
  Top 0.508: J1.2 7.81,16.4 C2.2 12.07,16.4 12.69,17.02 v14.22,17.02
  Bottom 0.305: v14.22,17.02 14.22,12.45 v14.73,11.94
VBUS_B  (1 unrouted)
  Top 0.203: J3.B9 27.96,3.58
VCC_3V3
  Top 0.762: FL3.2 15.37,45.85 9.04,39.52 9.04,36.86 C5.2 8.97,36.47 8.97,35.79 8.81,35.64 8.81,33.05 R2.1 8.81,32.66 8.81,31.9 9.12,31.6 9.58,31.6 10.11,31.06 10.11,27.92 7.82,25.64 7.82,22.59 9.38,21.03 20.5,21.03 21.2,21.73 | 25.31,23.48 26.15,22.64 29.66,22.64 C20.2 29.98,19.09 30.07,19 30.07,18.75 Q1.1 29.69,18.64 33.96,18.64 C9.2 34.34,18.8 34.34,19.86 34.8,20.32 36.78,20.32 38.61,22.15 38.61,22.45 R7.2 | 25.31,23.48 25.12,23.67 25.12,24.13 U2.5 | 25.31,23.48 24.97,23.14 21.62,23.14 C19.2 21.54,22.76 21.54,22.07 21.2,21.73 | 21.2,21.73 21.93,21.73 FL1.2
VCC_5V
  Top 0.762: 12.09,26.26 12.09,25.27 12.17,25.2 12.17,24.89 11.86,24.59 11.86,24.21 JP1.2 | 12.09,26.26 12.09,27.56 C1.1 | 29.62,25.04 28.55,23.98 28.02,23.98 27.86,24.13 27.48,24.13 U2.1 | 29.62,25.04 30.53,25.04 C17.2 30.76,24.74 30.76,24.21 31.22,23.75 42.88,23.75 | 27.48,26.11 27.86,26.11 28.09,26.34 28.55,26.34 29.54,25.35 29.62,25.04 | 27.48,26.11 U2.3 | 42.88,23.75 42.88,16.36 41.47,14.95 | 42.88,23.75 42.88,24.59 42.95,24.66 42.95,24.97 R10.2 | 41.47,14.95 41.43,14.91 41.43,13.84 C18.2 41.43,13.54 41.43,12.93 42.27,12.09 42.27,11.48 D13.C 42.42,11.1 42.42,10.72 42.8,10.34 43.1,10.34 44.55,8.89 44.55,5.99 44.02,5.46 C8.1 | D2.1 26.8,12.55 29.16,12.55 31.98,15.37 41.05,15.37 41.47,14.95 | 12.09,26.26 23.29,26.26 24.13,27.1 27.03,27.1 27.33,26.8 27.33,26.42 27.48,26.11
VDD
  Top 0.254: U3.7 U3.8
  Top 0.508: 15.04,10.21 11.43,6.6 9.4,6.6 9.4,3.3 12.77,3.3 MK1.3
  Top 0.762: C10.2 19.18,5.16 18.8,5.54 17.42,5.54 16.66,6.3 16.89,6.6 17.77,7.48 15.04,10.21 13.56,11.68 13.56,14.6 14.45,15.27 15.65,14.07 16.08,14.07 | 16.08,14.07 | 17.06,17.44 17.65,18.03 19.19,18.03 19.95,18.8 | 17.06,17.44 16.48,16.87 16.48,14.38 16.08,14.07 | U3.8 19,14.07 16.08,14.07 | C6.2 19.95,17.37 19.95,18.8 | 19.95,18.8 C4.2 | R3.1 19.38,15.11 17.06,17.44 | FL1.1 22.32,18.8 19.95,18.8

## Text on the board
bPlace: DUCK, / DUCK, / DUCK V1.0 | IDEO 2026